# Altium PCB PCB3.PcbDoc (part 1 of 2)
Units mil, origin at the board's own origin, x right, y up, seen from the top; angles counter-clockwise.
Board outline 2978 x 3898 mil, 2 copper layers (Top Layer, Bottom Layer); 131 components, 87 nets, 395 pads, 3442 vias.
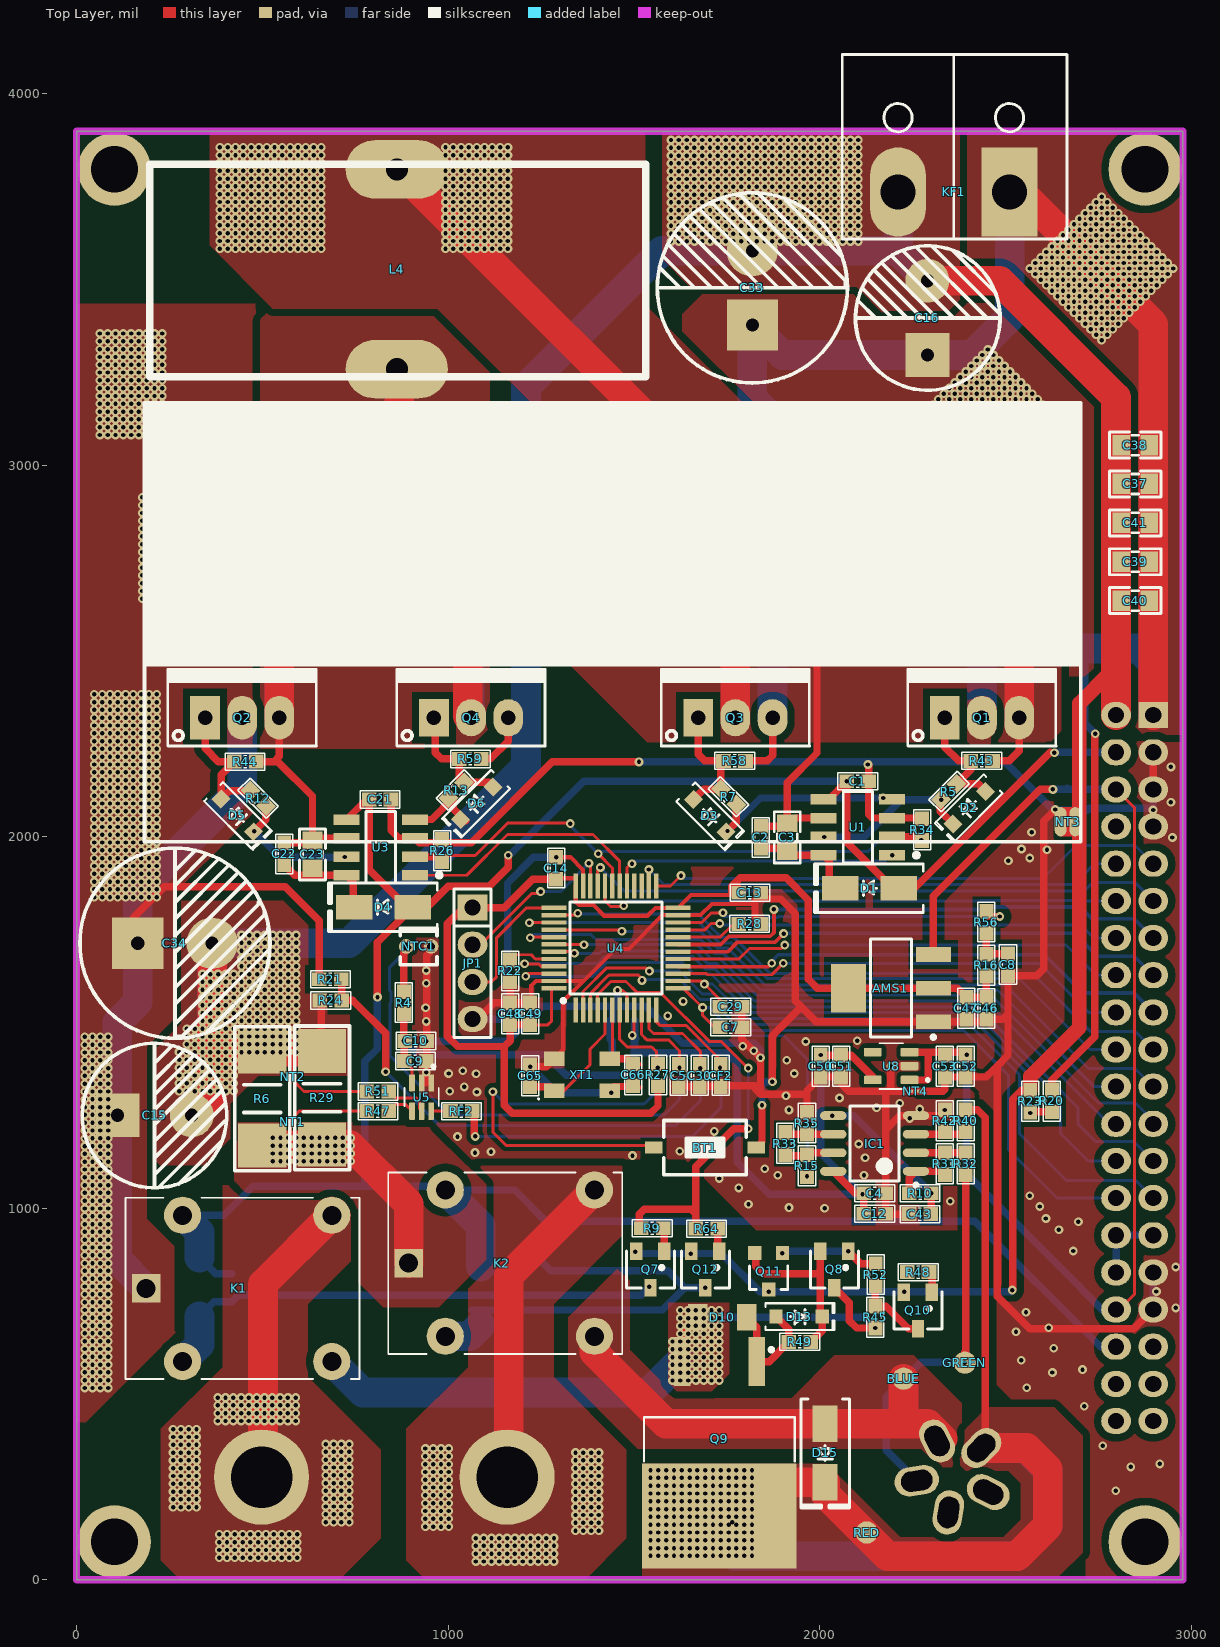
[diagram p0: Top Layer view]
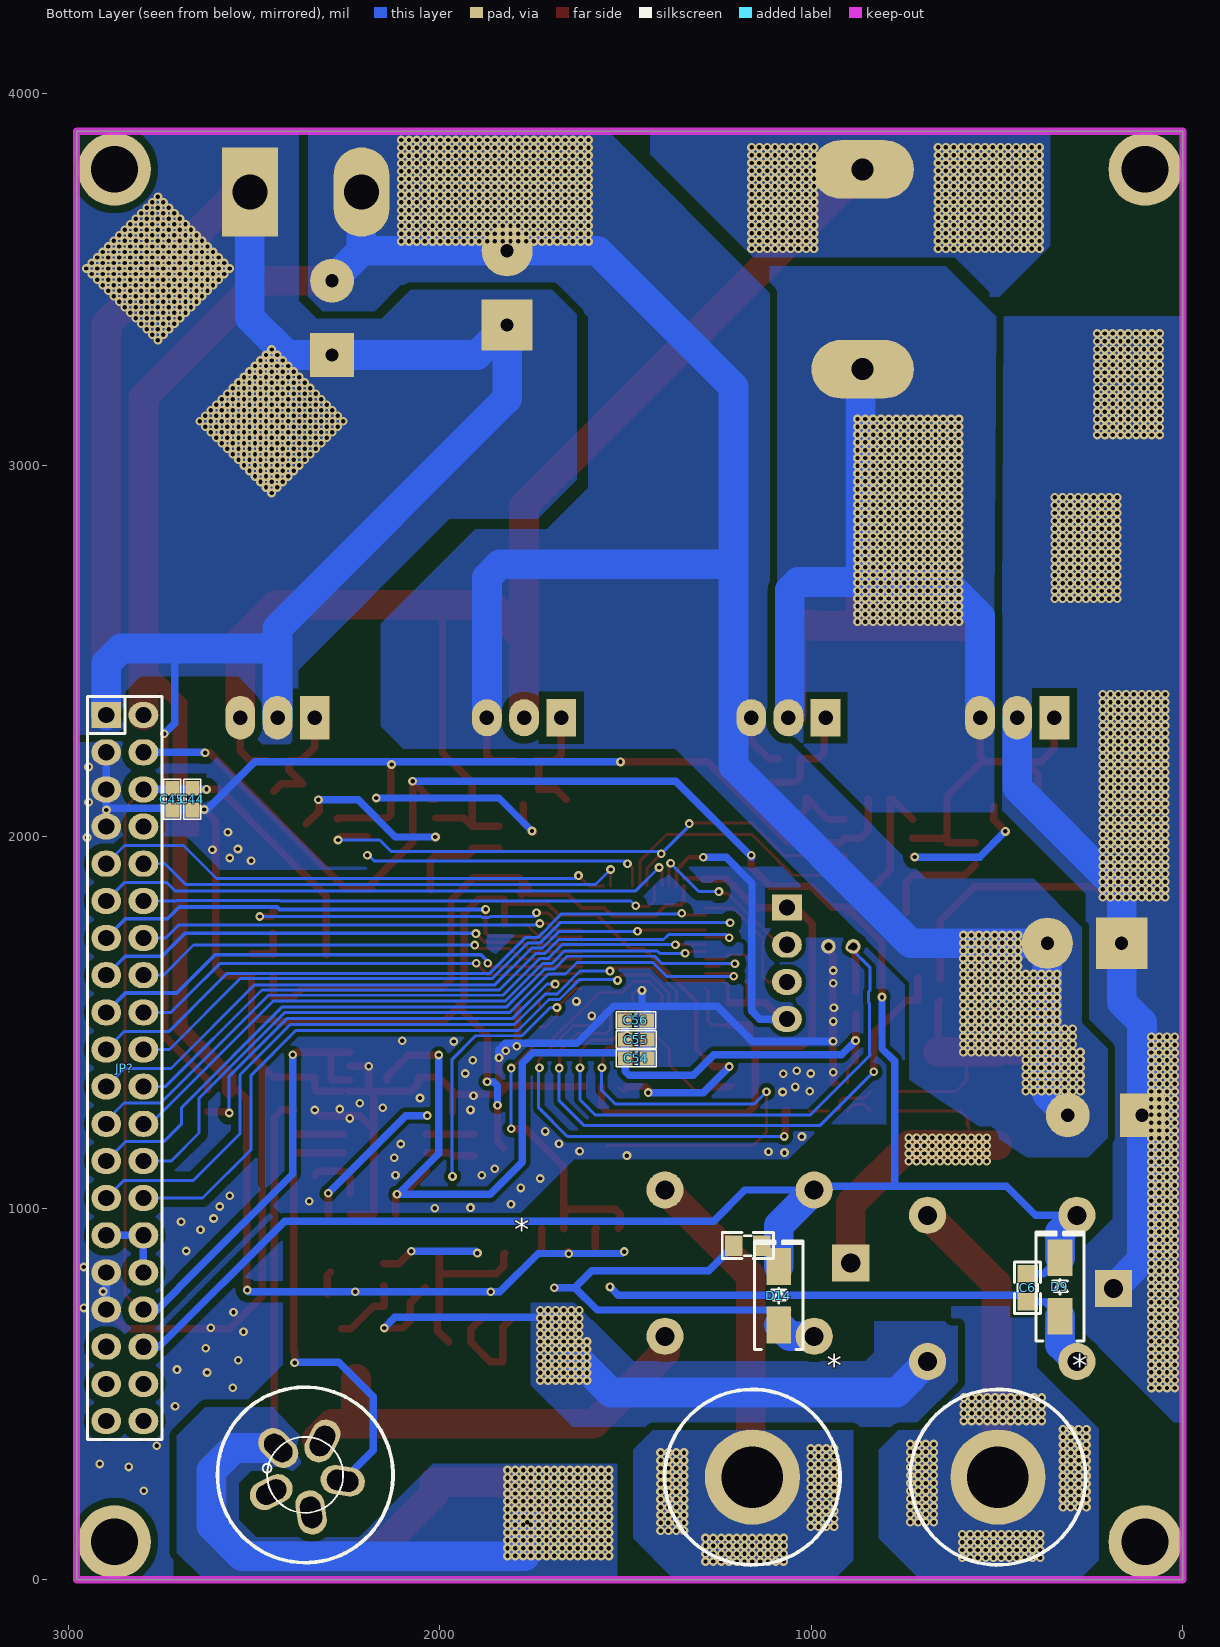
[diagram p1: Bottom Layer view, seen from below]
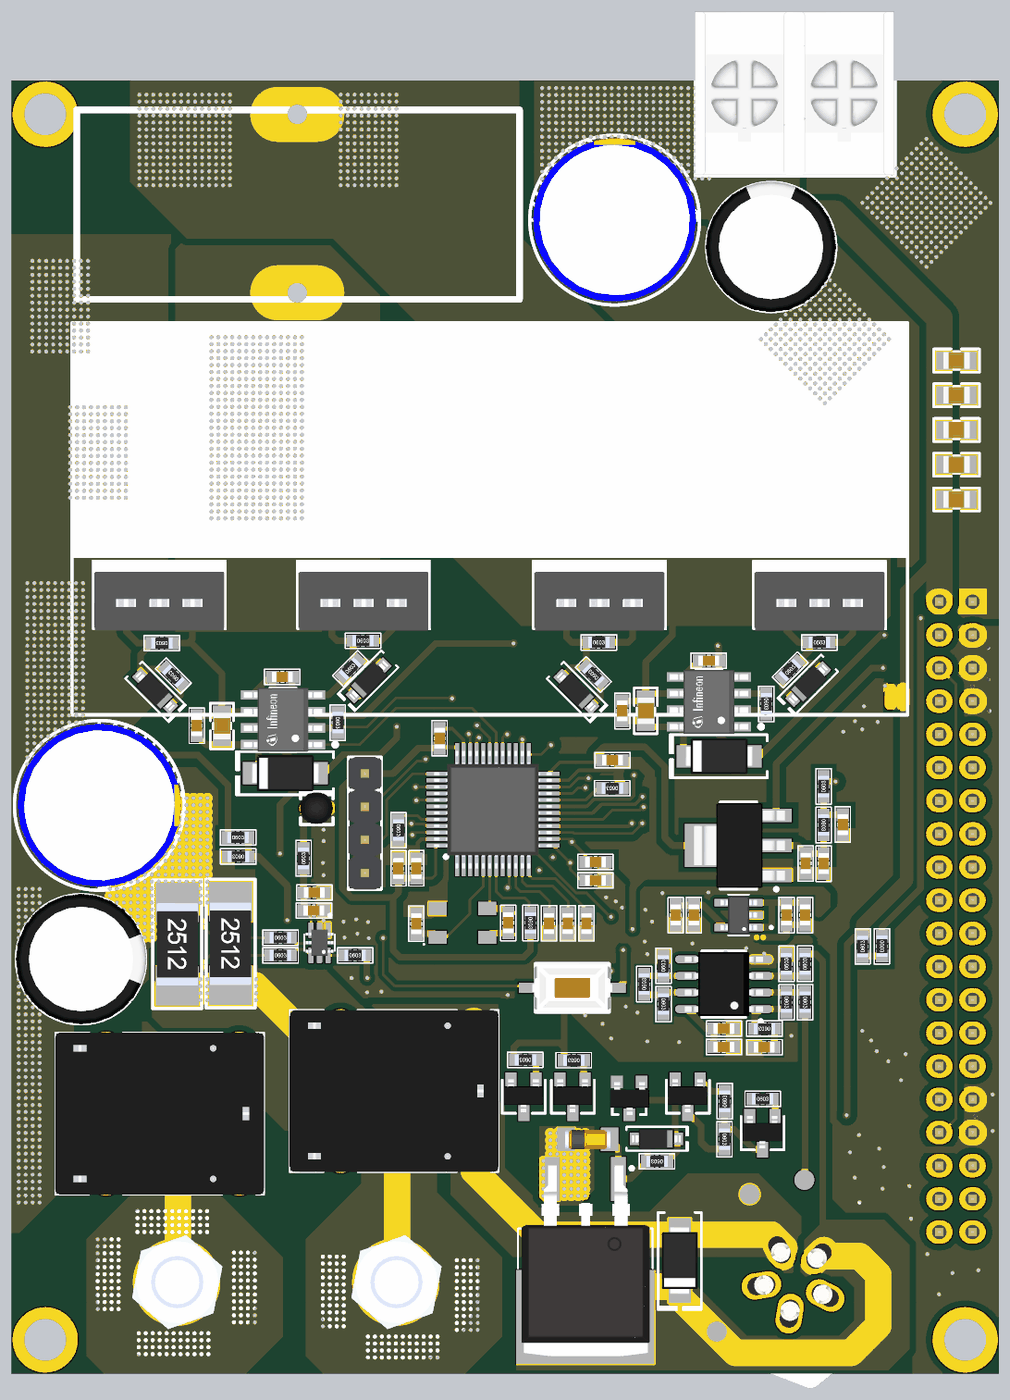
[diagram p3: 3D render of the assembled board from above, using the file's embedded part models]
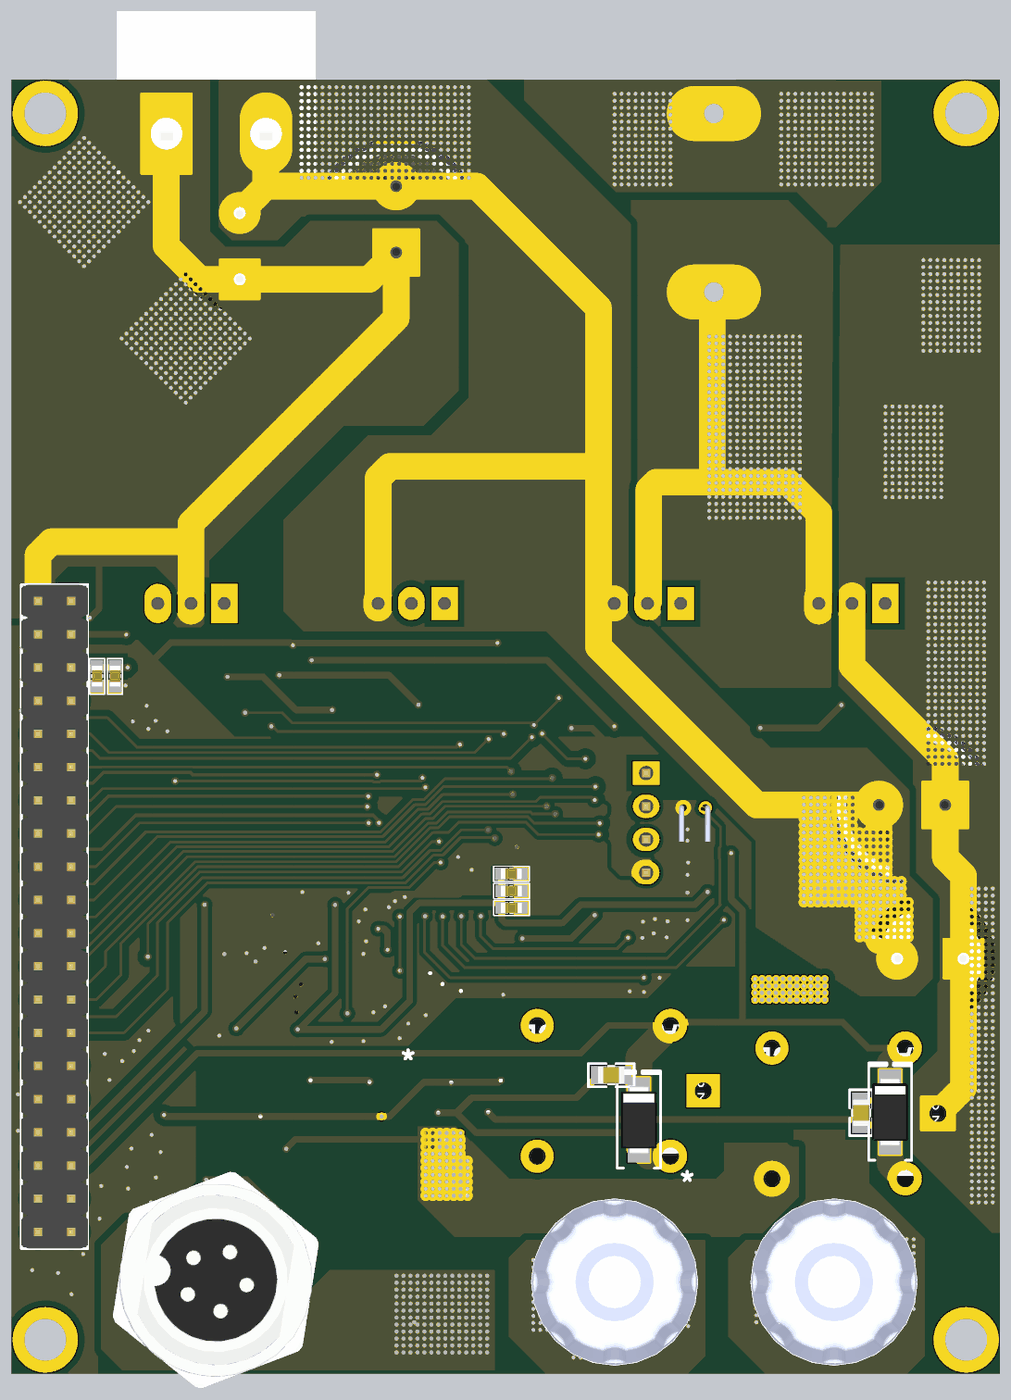
[diagram p4: 3D render of the assembled board from below, using the file's embedded part models]

## Layer stack, top to bottom
Top Solder: solder mask 0.4, Solder Resist, Dk 3.5
Top Layer: signal copper 1.4
Dielectric 1: dielectric 12.6, FR-4, Dk 4.8
Bottom Layer: signal copper 1.4
Bottom Solder: solder mask 0.4, Solder Resist, Dk 3.5

## Board outline
0,0 0,3898 2978,3898 2978,0

## Design rules (kind name [scope] priority, off if disabled: settings)
Clearance [All] p1: gap=20 ignorepadtopadclearanceinfootprint=FALSE
DiffPairsRouting [All] p1: maxlimit=10 minlimit=8 mostfreqgap=10 toplayer_minwidth=8 toplayer_maxwidth=13 toplayer_prefwidth=10 bottomlayer_minwidth=8 bottomlayer_maxwidth=13 bottomlayer_prefwidth=10 maxuncoupledlength=500
PolygonConnect [All] p1: connectstyle=Direct reliefconductorwidth=10 reliefentries=4 polygonreliefangle="90 Angle" airgapwidth=10
RoutingVias [All] p1: holewidth=11.81 width=23.62 viastyle="Through Hole" minholewidth=11.81 minwidth=23.62 maxholewidth=11.81 maxwidth=23.62
SolderMaskExpansion [All] p1: expansion=4 istentingtop=FALSE
Width [All] p1: maxlimit=80 minlimit=8 preferedwidth=20
29 further rules are at their usual default settings.

## Classes and differential pairs
differential pair S: +S_P -S_N
differential pair SO: +SO_P -SO_N

## Components (designator, comment, footprint, x,y, rotation, side; value= is the part's Value field where it differs from the comment)
* "Component_1" GX_12Jack? 2362.48,282 r45 bottom
* "Jack2" jack_coc_loa 498.06,276 r180 bottom
* "Jack1" jack_coc_loa 1159.06,276 r180 bottom
AMS1 "AMS1117-3.3V" SOT223 2192,1592 r90 top value="AMS1117-3.3V SOT223"
BLUE "TestPoin" TP-60 2225.98,540.89 r90 top
BT1 "Nut Nhan 2 Chan SMD 3x6x2.5" "Nut Nhan 2 Chan SMD 3x6x2.5" 1691.2,1163 r0 top
C1 "104" "tu 0603" 2103,2149 r180 top
C2 "105" "tu 0603" 1842,1998 r270 top
C3 "106" "tu 0805" 1913,1998 r90 top
C4 "103" "tu 0603" 2148,1040 r0 top
C5 "102" "tu 0603" 1621,1357 r90 top
C6 "10pF" "tu 0805" 418,786 r270 bottom
C7 "102" "tu 0603" 1761.47,1487 r180 top
C8 "102" "tu 0603" 2507,1655 r90 top
C9 "103" "tu 0603" 912,1396 r0 top
C10 "104" "tu 0603" 913,1450 r0 top
C12 "104" "tu 0603" 2148,985 r0 top
C13 "104" "tu 0603" 1812,1849 r0 top
C14 "104" "tu 0603" 1291,1915 r90 top
C15 "1000uF" "tu hoa 10mm" 210,1250 r0 top
C16 "1000uF" "tu hoa 10mm" 2290.27,3396 r90 top
C21 "104" "tu 0603" 817,2100 r180 top
C22 "105" "tu 0603" 559,1953.47 r270 top
C23 "106" "tu 0805" 635,1952 r90 top
C29 "102" "tu 0603" 1761.47,1542 r180 top
C30 "102" "tu 0603" 1677.5,1357 r90 top
C33 "1000uF" "tu hoa 13mm" 1819,3477 r90 top
C34 "1000uF" "tu hoa 13mm" 265,1713 r0 top
C37 "106" "tu 0805" 2849.81,2948.94 r180 top
C38 "106" "tu 0805" 2849.81,3053.55 r180 top
C39 "106" "tu 0805" 2849.81,2739.73 r180 top
C40 "106" "tu 0805" 2849.81,2635.13 r180 top
C41 "106" "tu 0805" 2849.81,2844.34 r180 top
C43 "102" "tu 0603" 2270,984 r0 top
C44 "104" "tu 0603" 2666,2101 r270 bottom
C45 "104" "tu 0603" 2720,2101 r270 bottom
C46 "104" "tu 0603" 2449,1537.79 r270 top
C47 "104" "tu 0603" 2395.07,1538.35 r270 top
C48 "104" "tu 0603" 1167,1523 r90 top
C49 "104" "tu 0603" 1221,1523 r90 top
C50 "106" "tu 0603" 2003,1382.53 r270 top
C51 "104" "tu 0603" 2058,1382.53 r270 top
C52 "106" "tu 0603" 2393,1382.53 r270 top
C53 "106" "tu 0603" 2337,1382.53 r270 top
C54 "104" "tu 0603" 1471.76,1403 r180 bottom
C55 "106" "tu 0603" 1471.76,1453.91 r180 bottom
C56 "106" "tu 0603" 1472.46,1505.53 r180 bottom
C65 "10pF" "tu 0603" 1221,1356 r90 top
C66 "10pF" "tu 0603" 1498,1359 r270 top
CF2 "102" "tu 0603" 1734,1357 r90 top
D1 "SS34" "DIODE SMA" 2134,1861 r180 top
D2 "S4" "DIODE SOD-123" 2403,2078 r225 top
D3 "S4" "DIODE SOD-123" 1704,2056 r315 top
D4 "SS34" "DIODE SMA" 826,1810 r180 top
D5 "S4" "DIODE SOD-123" 433,2057 r315 top
D6 "S4" "DIODE SOD-123" 1077,2090 r225 top
D9 "SS34" "DIODE SMA" 331,788 r90 bottom
D10 "9.1V" "DIODE ZENNER SMD SOD80" 1738.06,706 r0 top
D13 "S4" "DIODE SOD-123" 1945.01,708 r0 top
D14 "SS34" "DIODE SMA" 1088,764.26 r90 bottom
D15 "SS34" "DIODE SMA" 2015,341 r270 top
GREEN "TestPoin" TP-60 2391,584 r90 top
IC1 "LM358 SOP8" "SOP 8" 2148,1174 r180 top
JP1 "debug" "JP 1x4 DT" 1066,1809 r270 top
JP? "JP 2x20 2.54" "JP 2x20 DT" 2848,1377 r270 bottom
K1 "SRA-05VDC-CL" RELAY_SRA-05VDC-CL 447,784 r0 top
K2 "SRA-05VDC-CL" RELAY_SRA-05VDC-CL 1154,852 r0 top
KF1 "CON 2 KF7.62" "CON 2 KF7.62" 2509,3735 r180 top
L4 "97uH" IND_ATCA-08-750M-V 862,3583 r270 top
NT1 "0.25mm" NetTie_0.25mm 580,1222.32 r90 top net-tie
NT2 "0.25mm" NetTie_0.25mm 582,1364 r270 top net-tie
NT3 "NetTie_2mm" NetTie_2mm 2688,2040 r180 top net-tie
NT4 "0.25mm" NetTie_0.25mm 2266.71,1315 r180 top net-tie
NTC1 "50k" MF52 920.06,1703 r180 top
Q1 "IRFZ44" TO220#1 2337,2320 r0 top
Q2 "IRFZ44" TO220#1 346,2320 r0 top
Q3 "IRFZ44" TO220#2 1673.33,2320 r0 top
Q4 "IRFZ44" TO220#2 962,2320 r0 top
Q7 "BC817" SOT-23 1545,835 r180 top value=C9014
Q8 "BC817" SOT-23 2040,835 r180 top value=C9014
Q9 "IRF4905S" D2PACK 1709,346 r270 top
Q10 "BC817" SOT-23 2265,725 r180 top value=C9014
Q11 "BA" SOT23 1863,830.08 r180 top
Q12 "BC817" SOT-23 1693,835 r180 top value=C9014
R4 "10k" "tro smd 0603" 881,1553 r90 top
R5 "10R" "Tro smd 0603" 2348,2121 r45 top
R6 "0.01R" "tro smd 2512" 500,1295 r270 top
R7 "10R" "Tro smd 0603" 1755,2107 r135 top
R9 "10k" "Tro smd 0603" 1550,946 r180 top
R10 "1k" "Tro smd 0603" 2271,1040 r180 top
R12 "10R" "Tro smd 0603" 488.88,2103.12 r135 top
R13 "10R" "Tro smd 0603" 1022,2125 r45 top
R15 "1k" "Tro smd 0603" 1966,1114.47 r270 top
R16 "4.7k" "Tro smd 0603" 2449,1654.2 r270 top
R20 "10k" "tro smd 0603" 2625,1288.53 r270 top
R21 "10k" "tro smd 0603" 683,1616 r0 top
R22 "10k" "Tro smd 0603" 1167,1638.47 r270 top
R23 "100k" "tro smd 0603" 2567,1287.53 r90 top
R24 "100k" "tro smd 0603" 684.47,1559 r180 top
R26 "10k" "Tro smd 0603" 984,1962.53 r270 top
R27 "10k" "Tro smd 0603" 1565,1359 r270 top
R28 "10k" "Tro smd 0603" 1812,1765 r180 top
R29 "0.01R" "tro smd 2512" 661,1297 r270 top
R31 "100k" "Tro smd 0603" 2337,1120 r270 top
R32 "4.7k" "Tro smd 0603" 2393,1120 r270 top
R33 "100k" "Tro smd 0603" 1908,1174 r90 top
R34 "10k" "Tro smd 0603" 2276,2019 r270 top
R35 "10k" "Tro smd 0603" 1966,1229 r90 top
R40 "4.7k" "Tro smd 0603" 2393,1235 r90 top
R42 "100k" "Tro smd 0603" 2337,1235 r90 top
R43 "10k" "tro smd 0603" 2436,2204 r0 top
R44 "10k" "tro smd 0603" 454,2202 r180 top
R45 "4.7k" "tro smd 0603" 2150,707 r270 top
R47 "22R" "tro smd 0603" 811,1261 r0 top
R48 "1k" "tro smd 0603" 2265,828 r0 top
R49 "22R" "tro smd 0603" 1947,640 r180 top
R51 "22R" "tro smd 0603" 811,1314 r0 top
R52 "1k" "tro smd 0603" 2151,821 r90 top
R56 "4.7k" "Tro smd 0603" 2449,1769.6 r90 top
R58 "10k" "tro smd 0603" 1771,2204 r0 top
R59 "10k" "tro smd 0603" 1059.74,2209 r0 top
R64 "10k" "Tro smd 0603" 1696,945 r180 top
RED "TestPoin" TP-60 2126.98,126.89 r90 top
RF2 "1K" "Tro smd 0603" 1036,1261 r0 top
U1 "IR2184S" SOIC127P600X175-8N-12-V 2103,2025 r180 top
U3 "IR2184S" SOIC127P600X175-8N-12-V 818.87,1971 r180 top
U4 "STM32F103C8T6" LQFP-48_19.6_393_58X11_SMD 1452,1700 r90 top
U5 "INA199A3DCKR" SOT65P210X110-6N 929,1299 r270 top
U8 "LP5907MFX-2.85/NOPB" SOT95P280X145-5N 2192.59,1382.4 r180 top
XT1 "8 MHz" DFN220P320X110-4N 1360,1359 r0 top
? "10pF" "tu 0805" 1171,899 r0 bottom

## Footprints (in the part's own frame and the unit in brackets; to place one, negate y for a bottom-side part, rotate by r counter-clockwise, add the part's x,y. Pads: shape width x height; smd on the part's side, far side on the other; paste and mask are expansions set on the pad)
"CON 2 KF7.62" [mil]
  rect 150x240 hole 95: 1(-2,0)
  oval 150x240 hole 95: 2(298,0)
  silkscreen extent -157,-370 448,126, body extent -152,-370 448,122, height 493
D2PACK [mil]
  rect 132.23x44.65 smd: 1(-241.08,121.35) 3(-241.08,-78.65)
  rect 282.7x416 smd: 2(175.12,21.35)
  silkscreen extent -278,-182 28,224, body extent -282,-171 293,216, height 166
DFN220P320X110-4N [mm]
  rect 1.4x1 smd: 1(-1.9,-1.1) 3(1.9,1.1) G(-1.9,1.1) G(1.9,-1.1)
  silkscreen extent -3,-1.7 -2.9,-1.6, body extent -2.55,-1.65 2.55,1.65, height 1.1
"DIODE SMA" [mm] "SMA"
  rect 2.5x1.7 smd: 1(-2,0) 2(2,0)
  silkscreen extent -3.68,-1.65 3.75,1.65, body extent -2.6,-1.37 2.6,1.37, height 2.4
"DIODE SOD-123" [mm] "SOD-123"
  rect 0.9x0.95 smd: 1(-1.575,0) 2(1.575,0)
  silkscreen extent -2.3,-0.92 2.41,0.92, body extent -1.86,-0.78 1.86,0.77, height 1.35
"DIODE ZENNER SMD SOD80" [mm] "SOD80"
  rect 1.35x1.8 smd: 1(1.675,0) 2(-1.675,0)
  body extent -1.75,-0.76 1.75,0.74, height 1.45
GX_12Jack? [mm]
  oval 3.048x2 hole 1.4 slot 2.159 at 0 deg: 1(2.606,0)
  oval 3.048x2 hole 1.4 slot 2.159 at 108 deg rot 108: 2(0.809,-2.473)
  oval 3.048x2 hole 1.4 slot 2.159 at 36 deg rot 36: 3(-2.098,-1.528)
  oval 3.048x2 hole 1.4 slot 2.159 at 144 deg rot 144: 4(-2.098,1.528)
  oval 3.048x2 hole 1.4 slot 2.159 at 72 deg rot 72: 5(0.809,2.473)
  silkscreen extent -6,-6 6,6, body extent -10.89,-11.1 10.89,11.1, height 16.11
IND_ATCA-08-750M-V [mm]
  oval 4x7 hole 1.5: 1(-5.4,0) 2(8.255,0)
  silkscreen extent -5.75,-16.89 8.76,17.02
jack_coc_loa [mm]
  round 6.5 hole 4.2: 1(0,0)
  silkscreen extent -6,-6 6,6, body extent -6.45,-6.4 6.35,6.4, height 28.2
"JP 1x4 DT" [mil] "4 pins, 1 row, straight, gold plating"
  rect 70x80 hole 43.31: 1(0,0)
  oval 70x80 hole 43.31: 2(100,0) 3(200,0) 4(300,0)
  silkscreen extent -50,-50 350,50, body extent -50,-50 350,50, height 336
"JP 2x20 DT" [mil] "40 pins, dual pin, straight, gold plating"
  rect 70x80 hole 43.31: 1(-950,-50)
  oval 70x80 hole 43.31: 2(-850,-50) 3(-750,-50) 4(-650,-50) 5(-550,-50) 6(-450,-50) 7(-350,-50) 8(-250,-50) 9(-150,-50) 10(-50,-50) 11(50,-50) 12(150,-50) 13(250,-50) 14(350,-50) 15(450,-50) 16(550,-50) 17(650,-50) 18(750,-50) 19(850,-50) 20(950,-50) 21(950,50) 22(850,50) 23(750,50) 24(650,50) 25(550,50) 26(450,50) 27(350,50) 28(250,50) 29(150,50) 30(50,50) 31(-50,50) 32(-150,50) 33(-250,50) 34(-350,50) 35(-450,50) 36(-550,50) 37(-650,50) 38(-750,50) 39(-850,50) 40(-950,50)
  silkscreen extent -1000,-100 1000,100, body extent -1000,-100 1000,100, height 337
LQFP-48_19.6_393_58X11_SMD [mm] "48LQFP"
  rect 1.7x0.3 smd mask+0.076: 1(-4.238,2.75) 2(-4.238,2.25) 3(-4.238,1.75) 4(-4.238,1.25) 5(-4.238,0.75) 6(-4.238,0.25) 7(-4.238,-0.25) 8(-4.238,-0.75) 9(-4.238,-1.25) 10(-4.238,-1.75) 11(-4.238,-2.25) 12(-4.238,-2.75) 25(4.238,-2.75) 26(4.238,-2.25) 27(4.238,-1.75) 28(4.238,-1.25) 29(4.238,-0.75) 30(4.238,-0.25) 31(4.238,0.25) 32(4.238,0.75) 33(4.238,1.25) 34(4.238,1.75) 35(4.238,2.25) 36(4.238,2.75)
  rect 0.3x1.7 smd mask+0.076: 13(-2.75,-4.238) 14(-2.25,-4.238) 15(-1.75,-4.238) 16(-1.25,-4.238) 17(-0.75,-4.238) 18(-0.25,-4.238) 19(0.25,-4.238) 20(0.75,-4.238) 21(1.25,-4.238) 22(1.75,-4.238) 23(2.25,-4.238) 24(2.75,-4.238) 37(2.75,4.238) 38(2.25,4.238) 39(1.75,4.238) 40(1.25,4.238) 41(0.75,4.238) 42(0.25,4.238) 43(-0.25,4.238) 44(-0.75,4.238) 45(-1.25,4.238) 46(-1.75,4.238) 47(-2.25,4.238) 48(-2.75,4.238)
  silkscreen extent -3.72,-3.15 3.15,3.72, body extent -4.5,-4.5 4.5,4.5, height 1.7
MF52 [mm]
  round 1 hole 0.55: 1(-0.869,-0.039) 2(0.831,-0.039)
  silkscreen extent -1.27,-1.29 1.23,1.21, body extent -1.24,-1.24 1.26,2.56, height 5.45
NetTie_0.25mm [mm]
  round 0.25 smd paste-2 mask+0.102: 1(0,0) 2(0.5,0)
  Top Layer region: 0,0.125 0.5,0.125 0.5,-0.125 0,-0.125
NetTie_2mm [mm]
  oval 0.8x2 smd paste-2 mask+0.102: 1(0,0) 2(1,0)
  Top Layer region: 0,1 1,1 1,-1 0,-1
"Nut Nhan 2 Chan SMD 3x6x2.5" [mm] "Switch SMD type"
  rect 1.2x0.8 smd: 1(-3.5,0) 2(3.5,0)
  silkscreen extent -2.82,-1.85 2.82,1.85, body extent -3.05,-1.85 3.05,1.85, height 2.5
RELAY_SRA-05VDC-CL [mm]
  round 2.54 hole 1.3: COIL1(-4.1,5) COIL2(-4.1,-5) NC(6.1,5) NO(6.1,-5)
  rect 1.95x1.95 / inner round 1.95 / far side rect 2.54x2.54 hole 1.3: COM(-6.6,0)
  silkscreen extent -8,-6.2 8,6.2, body extent -8,-6.2 8,6.2, height 17.2
SOIC127P600X175-8N-12-V [mm] "SOIC,1.27mm pitch;8 pin,3.90mm W X 4.90mm L X 1.75mm H body"
  rect 1.78x0.72 smd paste+0 mask+0: 1(-2.34,1.905) 2(-2.34,0.635) 3(-2.34,-0.635) 4(-2.34,-1.905) 5(2.34,-1.905) 6(2.34,-0.635) 7(2.34,0.635) 8(2.34,1.905)
  silkscreen extent -4.15,-2.45 1,2.45, body extent -3,-2.45 3,2.45, height 1.76
"SOP 8" [mm] "SOIC, 8-Leads, Body 4.9x3.9mm, Pitch 1.27mm, IPC High Density"
  oval 1.8x0.6 smd: 1(-2.825,1.905) 2(-2.825,0.635) 3(-2.825,-0.635) 4(-2.825,-1.905) 5(2.825,-1.905) 6(2.825,-0.635) 7(2.825,0.635) 8(2.825,1.905)
  silkscreen extent -2.95,-2.55 1.67,2.98, body extent -2.99,-2.45 3,2.45, height 1.6
SOT23 [mm] "SOT23"
  rect 0.9x0.95 smd: 1(-0.95,-1.25) 2(0,1.25)
  rect 0.9x0.95 smd mask+0: 3(0.95,-1.25)
  silkscreen extent -1.3,-0.38 1.3,1.25, body extent -1.52,-1.23 1.48,1.27, height 1.06
SOT65P210X110-6N [mm]
  rrect25% 1.19x0.4 smd: 1(-0.96,0.65) 2(-0.96,0) 3(-0.96,-0.65) 4(0.96,-0.65) 5(0.96,0) 6(0.96,0.65)
  silkscreen extent -2.2,-1.17 0.62,1.17, body extent -1.05,-1 1.05,1, height 1.1
SOT95P280X145-5N [mm]
  rrect25% 1.21x0.58 smd paste+0 mask+0.102: 1(-1.255,0.95) 2(-1.255,0) 3(-1.255,-0.95) 4(1.255,-0.95) 5(1.255,0.95)
  silkscreen extent -2.6,-1.56 0.8,1.56, body extent -1.4,-1.45 1.4,1.45, height 1.45
SOT223 [mm]
  rect 1x2.4 smd: 1(-2.3,-2.9) 2(0,-2.9) 3(2.3,-2.9)
  rect 3.3x2.4 smd: 4(0,2.9)
  silkscreen extent -3.47,-3.03 3.35,1.4, body extent -3.25,-3.56 3.25,3.4, height 1.68
SOT-23 [mm] "SOT 23 _ 1-3-2"
  rect 0.85x1.2 smd: 1(-0.94,-1.245) 2(0.985,-1.25) 3(0.005,1.25)
  silkscreen extent -1.65,-1.27 1.65,1.27, body extent -1.47,-1.33 1.53,1.17, height 1.06
TO220#1 [mil] "TO-220"
  rect 80x118.11 hole 39: 1(0,0)
  oval 80x118.11 hole 39: 2(100,0) 3(200,0)
  silkscreen extent -100,-76 300,130, body extent -95,-80 295,97, height 323
TO220#2 [mil] "TO-220"
  rect 80x100 hole 39: 1(0,0)
  oval 80x100 hole 39: 2(100,0) 3(200,0)
  silkscreen extent -100,-76 300,130, body extent -95,-80 295,97, height 323
TP-60 [mil]
  round 60 smd: 1(0.11,-0.02)
"tro smd 0603" [mm] "Chip Capacitor, 2-Leads, Body 1,60x0,80mm, IPC Medium Density"
  rect 1x0.95 smd mask+0.076: 1(-0.75,0) 2(0.75,0)
  silkscreen extent -1.35,-0.58 1.37,0.58, body extent -0.82,-0.42 0.82,0.43, height 0.44
"Tro smd 0603" [mm] "Chip Capacitor, 2-Leads, Body 1,60x0,80mm, IPC Medium Density"
  rect 1x0.95 smd mask+0.076: 1(-0.75,0) 2(0.75,0)
  silkscreen extent -1.35,-0.58 1.37,0.58, body extent -0.82,-0.42 0.82,0.43, height 0.44
"tro smd 2512" [mm]
  rect 3x3.3 smd: 1(-3.2,0) 2(3.2,0)
  silkscreen extent -4.9,-1.88 4.93,1.88, body extent -3.12,-1.57 3.18,1.58, height 0.82
"tu 0603" [mm] "Chip Capacitor, 2-Leads, Body 1,60x0,80mm, IPC Medium Density"
  rect 1x0.95 smd mask+0.076: 1(-0.75,0) 2(0.75,0)
  silkscreen extent -1.35,-0.58 1.37,0.58, body extent -0.8,-0.4 0.8,0.4, height 0.9
"tu 0805" [mm] "Compoment SMD 80x50mil"
  rect 1.2x1.4 smd: 1(-0.946,-0.003) 2(0.954,-0.003)
  silkscreen extent -1.75,-0.89 1.75,0.89, body extent -1.01,-0.64 1.01,0.63, height 0.61
"tu hoa 10mm" [mm]
  rect 3x3 hole 0.9: 1(-2.54,0)
  round 3 hole 0.9: 2(2.54,0)
  silkscreen extent -4.95,-4.96 4.93,4.92, body extent -5,-5 5.01,5, height 20.01
"tu hoa 13mm" [mm]
  rect 3.5x3.5 hole 0.9: 1(-2.54,0)
  round 3.5 hole 0.9: 2(2.54,0)
  silkscreen extent -6.5,-6.5 6.5,6.5, body extent -6.25,-6.25 6.26,6.25, height 23.02

## Part data
* *: library part Jack?
AMS1: library part "AMS1117 SMD", "Dán", Chung_Loai=Dán, Don_Vi=Con, Ma_Hang=MH000596
C1 C2 C13 C14 C21 C22 C44 C45 C46 C47 C48 C49: library part "Tu 0603 101 50V 10%", "Dán", Chung_Loai=Dán, Don_Vi=Con, Ma_Hang=MH004565, So_Chan=2, Ten_Linh_Kien="Tụ 0603 101-0.1nF 10% 50V"
C3 C6 C23 ?: library part "Tu 0805 101 50V 20%", "Dán", Chung_Loai=Dán, Don_Vi=Con, Ma_Hang=MH002806, So_Chan=2, Ten_Linh_Kien="Tụ 0805 101-0.1nF 50V 20%"
C4 C7 C8 C9 C10 C12 C43 C50 C51 C52 C53 C54 C55 C56 CF2: library part "Tu 0603 106 16V 20%", "Dán", Chung_Loai=Dán, Don_Vi=Con, Ma_Hang=MH004848, So_Chan=2, Ten_Linh_Kien="Tụ 0603-10uF 20% 16V"
C5 C29 C30 C65 C66: library part "Tu 0603 104 50V 10%", "Dán", Chung_Loai=Dán, Don_Vi=Con, Ma_Hang=MH004568, So_Chan=2, Ten_Linh_Kien="Tụ 0603 104-100nF 10% 50V"
C15 C16: library part "Tu Hoa 1000uF 10V 10x12", "Cắm", Chung_Loai=Cắm, Don_Vi=Con, Ma_Hang=MH006614, So_Chan=2, Ten_Linh_Kien="Tụ Hóa 1000uF 10V 10x12MM"
C33 C34: library part "Tu Hoa 1000uF 50V 13x26", "Cắm", Chung_Loai=Cắm, Don_Vi=Con, Ma_Hang=MH006619, So_Chan=2, Ten_Linh_Kien="Tụ Hóa 1000uF 50V"
C37 C38 C39 C40 C41: library part "Tu 0805 106 16V 10%", "Dán", Chung_Loai=Dán, Don_Vi=Con, Ma_Hang=MH004553, So_Chan=2, Ten_Linh_Kien="Tụ 0805 106-10uF 10% 16V"
D1 D4 D9 D14 D15: library part "Diode SS34 ( 1N5822 )", "Dán", Chung_Loai=Dán, Don_Vi=Con, Ma_Hang=MH002104, Ten_Linh_Kien="Diode SS34 3A 40V SMA ( 1N5822 SS34A)"
D2 D3 D5 D6 D13: library part "Diode S4", "Dán", Chung_Loai=Dán, Don_Vi=Con, Ma_Hang=MH005519, Ten_Linh_Kien="Diode S4 SOD123 ( 1N5819 SOD123)"
D10: library part "Diode Zener 9.1V", "Dán", Chung_Loai=Dán, Don_Vi=Con, Ma_Hang=MH002882, Ten_Linh_Kien="Diode Zener 1/2W 9.1V SMD1206 ZMM9.1"
IC1: "Dán", Chung_Loai=Dán, Don_Vi=Con, Ma_Hang=MH000609, Ten_Linh_Kien="LM358 SOP8"
JP1: library part "JP 1x4 2.54 Duc Thang", "Cắm", Chung_Loai=Cắm, Don_Vi=Con, Ma_Hang=MH000903, Ten_Linh_Kien="Jump Đơn Đực 2.54MM 1x40P Thẳng 11MM"
JP?: library part "JP 2x20 2.54 Duc Thang", "Cắm", Chung_Loai=Cắm, Don_Vi=Con, Ma_Hang=MH002686, Ten_Linh_Kien="Jump Đôi Đực 2.54MM 2x40P Thẳng 11MM"
K1 K2: Package=Package, Check_prices=https://www.snapeda.com/parts/SRA-05VDC-CL/Songle+Relay/view-part/?ref=eda, MF="Songle Relay", MP=SRA-05VDC-CL, SnapEDA_Link=https://www.snapeda.com/parts/SRA-05VDC-CL/Songle+Relay/view-part/?ref=snap
KF1: "Cắm", Chung_Loai=Cắm, Don_Vi=Con, Ma_Hang=MH002053, Ten_Linh_Kien="CON 2 KF7.62-2P 7.62MM (Đen Thẳng)"
L4: library part ATCA-08-750M-V, Package=None, Availability=Unavailable, MP=ATCA-08-750M-V, Price=None
NT1 NT2 NT4: library part NetTie_0.25mm
NTC1: library part NCP15XH103F03RC, "THERMISTOR 10K OHM NTC 0402 SMD"
Q1 Q2 Q3 Q4: library part "FET IRFZ44 DIP", "TO-220"
Q7 Q8 Q10 Q12: library part "Trans BC817", "SOT-23 - C8658"
Q9: "55V 75A"
Q11: library part "Trans A1015 BA SMD", "PNP 600mW, ECB"
R4 R20 R21 R23 R24: library part "Tro 0603 5% 10k", "Dán", Chung_Loai=Dán, Don_Vi=Con, Ma_Hang=MH006316, So_Chan=2, Ten_Linh_Kien="Trở 0603 5% 10k"
R5 R7 R9 R10 R12 R13 R15 R16 R22 R26 R27 R28 R31 R32 R33 R34 R35 R40 R42 R45 R47 R48 R49 R51 R52 R56 R64 RF2: library part "Tro 0603 5% 10R", "Dán", Chung_Loai=Dán, Don_Vi=Con, Ma_Hang=MH006317, So_Chan=2, Ten_Linh_Kien="Trở 0603 5% 10R"
R6 R29: library part "Tro 2512 1% 0.01R", "Dán", Chung_Loai=Dán, Don_Vi=Con, Ma_Hang=MH004912, So_Chan=2, Ten_Linh_Kien="Trở 2512 1% R010-0.01R 1W"
R43 R44 R58 R59: library part "Tro 0603 1% 0R", "Dán", Chung_Loai=Dán, Don_Vi=Con, Ma_Hang=MH005792, So_Chan=2, Ten_Linh_Kien="Trở 0603 1% 0R"
U1 U3: "Half-Bridge Driver", Manufacturer="Infineon Technologies", Manufacturer Order Number=IR2184S, PackageReference=PG-DSO-8-910
U4: library part IC_STM32F103C8T6, "ARM® Cortex®-M3 STM32F1 Microcontroller IC 32-Bit 72MHz 64KB (64K x 8) FLASH 48-LQFP (7x7)", Alternate Part Number-1=NA, Case/Package=LQFP48, Manufacturer=STMicroelectronics, Manufacturer Part Number=STM32F103C8T6, Supplier Part Number-1=STM32F103C8T6, Supplier-1=LCSC
U5: "26V, bi-directional current sense amplifier", Package="SOT-SC70-6 Texas Instruments", Check_prices=https://www.snapeda.com/parts/INA199A3DCKR/Texas+Instruments/view-part/?ref=eda, MF="Texas Instruments", MP=INA199A3DCKR, SnapEDA_Link=https://www.snapeda.com/parts/INA199A3DCKR/Texas+Instruments/view-part/?ref=snap
U8: "250-mA, low-noise, high-PSRR, ultra-low-dropout voltage regulator with low IQ and enable", Package="SOT-23-5 Texas Instruments", Check_prices=https://www.snapeda.com/parts/LP5907MFX-2.85/NOPB/Texas+Instruments/view-part/?ref=eda, MF="Texas Instruments", MP=LP5907MFX-2.85/NOPB, SnapEDA_Link=https://www.snapeda.com/parts/LP5907MFX-2.85/NOPB/Texas+Instruments/view-part/?ref=snap
XT1: library part ABM3B-8.000MHZ-10-1-U-T, "Crystal 8MHz ±10ppm 10pF 200 Ohm -10°C ~ 60°C Surface Mount 4-SMD, No Lead (DFN, LCC)", Frequency Stability=±10ppm, Load Capacitance=10pF, Manufacturer="Abracon LLC", Operating Mode=Fundamental, Operating Temperature="-10°C ~ 60°C", Package / Case="4-SMD, No Lead", Ratings=-, Supplier Part Number 1=535-9721-1-ND, Category="Crystals, Oscillators, Resonators", ComponentLink1Description=http://www.abracon.com/Resonators/abm3b.pdf, ComponentLink1URL=http://www.abracon.com/Resonators/abm3b.pdf, Frequency Tolerance=±10ppm, Height - Seated (Max)="0.043\" (1.10mm)", Manufacturer Part Number=ABM3B-8.000MHZ-10-1-U-T, Mounting Type="Surface Mount", Packaging="Cut Tape (CT)", Part Status=Active, Pricing 1="1=0.69, 10=0.578, 50=0.5198, 100=0.462, 500=0.4389 (USD)", Pricing 2="1000=0.336, 3000=0.315, 5000=0.3045, 10000=0.294 (USD)", RoHS="RoHS Compliant", Size / Dimension="0.197\" L x 0.126\" W (5.00mm x 3.20mm)", Stock=35437, Supplier 1=Digi-Key, Supplier 2=Digi-Key, Supplier Part Number 2=535-9721-2-ND, Type="MHz Crystal"
BT1: Ma_Hang=MH001036, Ten="Nút Nhấn 2 Chân 3x6x2.5MM SMD"

## Free pads (board coordinates)
  round 196.85 hole 125.98: 12(102,102) 12(102,3796) 12(2876,102) 12(2876,3796)

## Via types
v1: diameter 23.62, hole 11.81, Top Layer to Bottom Layer, tented both sides, 2994 vias
v2: diameter 23.62, hole 11.81, Top Layer to Bottom Layer, 448 vias

## Nets (pads, with @x,y where several pads share a name; then routed paths per layer and width w, separated by ;. In a path a pad name is that pad's centre, name@x,y a point inside that pad or via, vN(x,y) a via of type N, cw(c..) or ccw(c..) an arc to the next point about the centre after c; other vN are vias at no path point)
3v3: AMS1.2 AMS1.4 C13.1 C14.1 C46.1 C47.1 C48.1 C49.1 JP1.1 R16.2 R27.2 U4.24 U4.36 U4.48 | length 3336.4
  Top Layer w8: C49.1@1221,1493.47 1268.47,1493.47 1279,1504 1279,1585.58 U4.48@1285.15,1591.73
  Top Layer w11: C14.1@1291,1885.47 1306.53,1885.47 1304,1888 U4.36@1343,1888 ; U4.36@1343.73,1866.85 1343.73,1824.27 1352.19,1815.81 1391.19,1815.81 1420,1787 1537,1787 1558.27,1808.27 U4.24@1618.85,1808.27 1653.58,1843 C13.1@1763,1843
  Top Layer w20: C49.1@1221,1493.47 C48.1@1167,1493.47 1167,1451 1151,1435 ; C14.1@1291,1885.47 1227.47,1885.47 1151,1809 JP1.1@1066,1809 1042,1809 998,1765 998,1463 1026,1435 1151,1435 ; R27.2@1565,1329.47 1565,1275 1545,1255 1173,1255 1151,1277 1151,1435 ; C13.1@1763,1853.47 1763,1866 1786,1889 1910,1889 1970,1829 1970,1616 1994,1592 AMS1.4@2077.83,1592 AMS1.2@2306.17,1592 2370.94,1592 C47.1@2395.07,1567.87 2448.45,1567.87 C46.1@2449,1567.32 R16.2@2449,1624.67 ; C13.1@1778,1843 C13.1@1778,1866 ; C13.1@1778,1853.47 C13.1@1782.47,1849
+5: AMS1.3 C44.1 C45.1 C52.1 C53.1 JP?.24 JP?.38 U8.1 U8.3 | length 3373.7
  Top Layer w8: JP?.24@2798,727 2806,727 2848,769 2848,2077 JP?.38@2798,2127
  Top Layer w20: U8.1@2242,1345 2290,1345 2293,1348 2293,1415.8 2289,1419.8 ; U8.3@2242,1419.8 2289,1419.8 ; AMS1.3@2306.17,1682.55 2306.17,1839.17 2445,1978 2594,2127 v1(2628,2127) ; v1(2396.13,1412.62) 2395.57,1412.06 C52.1@2393,1412.06 2385.25,1419.8 2289,1419.8
  Bottom Layer w20: v1(2396.13,1412.62) 2396.13,1091.87 2646,842 2761,727 JP?.24@2798,727 ; v1(2628,2127) 2662.47,2127 C44.1@2666,2130.53 2669.53,2127 JP?.38@2798,2127
+12: ?.1 C1.2 C6.1 C21.2 D1.1 D4.1 D9.2 D14.2 JP?.23 JP?.39 K1.COIL1 K2.COIL1 U1.5 U3.5 | length 7265.4
  Top Layer w20: U3.5@726.75,2046 780.75,2100 C21.2@787.47,2100 787.47,1911.27 D4.1@902.74,1796 ; v1(810,1568) 810,1715.26 D4.1@904.74,1810 944,1810 1000,1866 1111,1866 1162,1917 v1(1162,1950) ; U1.5@2010.87,2100 2024.47,2100 v1(2073.47,2149) 2073.47,1984.53 2197,1861 D1.1@2212.74,1861 ; D1.1@2182.74,1860 2254,1860 v1@2621,2227
  Bottom Layer w20: K1.COIL1@285.58,980.85 396.85,980.85 475,1059 ; D9.2@331,866.74 374.51,823.23 C6.1@418.13,823.23 ; 776,1067 776,1395 810,1429 v1(810,1568) ; v1@1161,1945 1365,2149 v1(2073.47,2149) ; v1(2632,2226) 2633,2227 JP?.39@2798,2227 ; JP?.23@2798,627 2756,627 2418,965 1263,965 1179.15,1048.85 K2.COIL1@992.58,1048.85 982.43,1059 776,1059 ; 475,1059 483,1059 776,1059 ; 475,1059 776,1059
  Bottom Layer w80: K1.COIL1@285.58,980.85 331,935.43 D9.2@331,866.74 ; K2.COIL1@992.58,1048.85 1088,953.43 D14.2@1088,843
AGND: C4.2 C5.1 C7.1 C9.2 C10.2 C12.2 C29.1 C30.1 C43.1 C50.2 C51.2 C54.2 C55.2 C56.2 CF2.1 IC1.4 NT4.2 NTC1.1 R35.2 R42.2 U4.8 U5.1 U5.2 U8.2 | length 3344.1
  Top Layer w8: U5.2@929,1336.8 941.8,1336.8 ; v1(1456,1586) 1471,1586 1481.53,1575.47 U4.8@1481.53,1533.15
  Top Layer w20: C9.2@941.53,1396 C9.2@941.8,1396.27 ; v1(941.59,1449.06) C10.2@942.53,1450 942.53,1680.81 NTC1.1@963.2,1701.48 ; 941.8,1336.8 C9.2@941.8,1396.27 ; C10.2@942.53,1449.06 942.53,1397 C9.2@941.8,1396.27 ; C5.1@1611,1328 1620.53,1328 C5.1@1621,1328.47 ; C5.1@1621,1327.47 1639.23,1327.47 1639.7,1327 1676.53,1327 C30.1@1677,1327.47 ; C30.1@1677.5,1327.47 1678.03,1328 1732.53,1328 CF2.1@1733,1328.47 ; CF2.1@1734,1327.47 1735.54,1329.02 1827.46,1329.02 1827.46,1320.54 1841,1307 ; C29.1@1791,1542 C7.1@1791,1487 1791,1455 v1(1841,1405) 1841,1307 ; R35.2@1966,1258.53 1966,1302 ; 2192,1315 2192,1382.4 U8.2@2242,1382.4 ; C43.1@2240.47,984 2178.53,984 C12.2@2177.53,985 C4.2@2177.53,1040 2177.53,1211.53 ; NT4.2@2247.02,1315 2176,1315 ; R42.2@2337,1264.53 2321.47,1249 IC1.4@2259.22,1249 2215,1249 2177.53,1211.53 ; 1841,1307 1961,1307 1966,1302 ; 1966,1302 1966,1316 C50.2@2003,1353 C51.2@2058,1353 2058,1335 2078,1315 2176,1315 ; 2176,1315 2177.53,1313.47 2177.53,1211.53
  Bottom Layer w20: v1(941.59,1449.06) 1159.06,1449.06 1253,1543 1442.94,1543 1456,1543 ; C55.2@1437,1453.91 C56.2@1437,1505.53 ; C54.2@1442.23,1403 C55.2@1442.23,1449.06 ; C56.2@1442.94,1505.53 1442.94,1541.34 ; v1(1456,1586) 1456,1543 ; v1(1841,1405) 1841,1427 1824,1444 1760.77,1444 1631,1444 1532,1543 1456,1543
  other v1: 2013.53,999.53 1917.53,1001.53 1808.53,1010.53 2351.86,1018.53 1782.53,1054.53 1729.83,1079.85 1887.53,1088.53 2119.53,1088.53 1852.48,1106.29 2122.55,1135.55 1496.53,1141.53 1072.53,1149.53 1115.53,1151.53 1623.88,1153.03 2105.53,1172.53 1679.53,1173.53 1025.53,1192.53 1716.53,1206.53 2242.53,1241.53 2336.53,1264.06 1917.53,1264.53 2269.53,1266.53 2153.49,1270.01 2215.94,1282.39 2053.53,1296.53 1909.53,1302.53 1077.53,1312.53 1004.53,1314.53 1043.36,1326.33 1001.56,1362.43 1075.53,1361.53 1931.53,1362.53 941.33,1366.06 1039.53,1369.53 2191.53,1381.93 1911.56,1398.28 1822.53,1423.53 1793.02,1435.75 1962.53,1448.53 2101.53,1450.53 941.53,1502.53 1591.53,1517.53 939.53,1539.53 1632.53,1556.53 941.53,1605.53 941.53,1639.53
AVCC: C4.1 C9.1 C10.1 C12.1 C50.1 C51.1 C54.1 C55.1 C56.1 IC1.8 R4.1 U4.9 U5.3 U8.5 | length 2786.7
  Top Layer w8: C9.1@882.47,1396 903.41,1375.06 U5.3@903.41,1336.8 ; v1(1496,1465) 1501,1470 1501,1528.92 1498.99,1530.93 U4.9@1501.21,1533.15
  Top Layer w20: R4.1@881,1523.47 v1(881,1451) 881,1450.47 C10.1@882.47,1449 ; C9.1@882.47,1396 C10.1@882.47,1449 ; C10.1@883.47,1450 C10.1@882.47,1449 ; v1(2003,1412.06) C51.1@2058,1412.06 2084.94,1412.06 2143.18,1353.82 U8.5@2143.18,1345 ; IC1.8@2036.78,1099 2095.78,1040 C4.1@2115.54,1040 ; C12.1@2118.47,985 C4.1@2118.47,1037.15
  Bottom Layer w20: v1(881,1451) 919,1413 1263,1413 1318,1358 1491,1358 1501.28,1368.28 C54.1@1501.28,1403 1503,1403 C55.1@1503,1453.91 ; v1(1496,1465) C55.1@1505.04,1455.96 ; C55.1@1501.29,1453.91 1501.29,1418 1750,1418 1778,1390 1778,1124 1864.85,1037.15 v1@2112.85,1037.15 ; C55.1@1501.99,1464 C56.1@1501.99,1505.53 ; v1(2003,1412.06) 2003,1147 v1@2112.85,1037.15 ; v1(2115.54,1037.15) v1@2112.85,1037.15
Blue: *.2 BLUE.1 D15.1 K2.NO | length 1199.5
  Top Layer w80: K2.NO@1394.16,655.15 1394.16,611.84 1586.26,419.74 D15.1@2015,419.74 2231,419.74 ; BLUE.1@2226,541 2226,424.74 2231,419.74 ; *.2@2330.73,379.35 2290.34,419.74 2231,419.74
BT1: JP?.28 U4.46 | length 1959.7
  Top Layer w8: v1(1209,1624) 1216.1,1631.1 U4.46@1285.15,1631.1
  Bottom Layer w8: v1(1209,1624) 1282,1624 1390,1624 1427,1661 1631,1661 1662,1630 1708,1630 1811,1527 2417,1527 2648,1296 2648,1202 2723,1127 JP?.28@2798,1127
BT2: JP?.13 U4.45 | length 2036.4
  Top Layer w8: v1@1206,1657.91 1207.1,1656.81 1244.03,1656.81 1250.06,1650.79 U4.45@1285.15,1650.79
  Bottom Layer w8: v1(1206,1658) 1402,1658 1422,1678 1658,1678 1692,1644 1718,1644 1820,1542 2424,1542 2695,1271 2695,1227 2743,1179 2846,1179 JP?.13@2898,1127
BT3: JP?.29 U4.43 | length 1709.7
  Top Layer w8: U4.43@1285.15,1690.16 1335.84,1690.16 v1(1340,1686)
  Bottom Layer w8: v1(1340,1686) 1408.15,1686 1414.15,1692 1665,1692 1699,1658 1724,1658 1825,1557 2449,1557 2779,1227 JP?.29@2798,1227
BT4: JP?.12 U4.42 | length 1826
  Top Layer w8: U4.42@1285.15,1709.84 1359.16,1709.84 1366,1703 v1(1366,1709)
  Bottom Layer w8: v1(1366,1709) 1671,1709 1708,1672 1731,1672 1830,1573 2461,1573 2751,1283 2850,1283 2898,1235 JP?.12@2898,1227
BT5: JP?.30 U4.41 | length 1814.5
  Top Layer w8: v1(1221,1728) 1222.53,1729.53 U4.41@1285.15,1729.53
  Bottom Layer w8: v1(1221,1728) 1229,1736 1385,1736 1398,1723 1680,1723 1717,1686 1741,1686 1840,1587 2479,1587 2739,1327 JP?.30@2798,1327
buzzer: JP?.27 U4.3 | length 1850.4
  Top Layer w8: U4.3@1383.1,1533.15 1383.1,1576.1 1386.79,1579.79 1386.79,1581.41 1422,1616.63 1431.37,1626 1433,1626 1435,1628 1511,1628 1522,1617 v1(1522,1613)
  Bottom Layer w8: v1(1522,1613) 1524,1615 1625,1615 1678.09,1561.91 1706.09,1561.91 1790,1478 2388,1478 2508,1358 2508,1158 2639,1027 JP?.27@2798,1027
CLK: JP1.3 U4.37 | length 363.2
  Top Layer w8: JP1.3@1066,1609 1117,1609 1131,1623 1131,1728 1211.27,1808.27 U4.37@1285.15,1808.27
CS: JP?.34 U4.21 | length 1202.3
  Top Layer w8: U4.21@1618.85,1749.21 1691.21,1749.21 1708,1766 v1(1731,1766)
  Bottom Layer w8: v1(1731,1766) 1735,1762 1774,1762 2703,1762 2738,1727 JP?.34@2798,1727
current_sense: CF2.2 RF2.2 U4.12 | length 1145.6
  Top Layer w8: U4.12@1560.27,1533.15 1560.27,1501.73 1570,1492 1640.2,1492 1725.2,1407 1726,1407 1734,1399 1734,1380 v1(1732,1378)
  Top Layer w20: RF2.2@1065.53,1261 1071,1261 1071,1195 v1(1073,1193)
  Bottom Layer w8: v1(1073,1193) 1657,1193 1734,1270 1734,1376 v1(1732,1378)
DC: JP?.8 U4.18 | length 1347
  Top Layer w10: U4.18@1618.85,1690.16 1753.16,1690.16 1779,1716 1880.74,1716 1903,1738.26 v1(1903,1739)
  Bottom Layer w10: v1(1903,1739) 1904,1740 2686,1740 2748,1678 2847,1678 JP?.8@2898,1627
enc_a: JP?.10 U4.38 | length 1768.8
  Top Layer w8: U4.38@1285.15,1788.58 1345.58,1788.58 1349,1792 v1(1349,1794)
  Bottom Layer w8: v1(1349,1794) 1350.81,1792.19 1672.66,1792.19 1707,1757.85 1707,1757 1735,1729 1769,1729 1866,1632 2573,1632 2603,1602 2730,1475 2850,1475 JP?.10@2898,1427
enc_b: JP?.31 U4.39 | length 1787.1
  Top Layer w8: v1(1218.92,1768.23) 1219.15,1768 1222,1768 1222.9,1768.9 U4.39@1285.15,1768.9
  Bottom Layer w8: v1(1218.92,1768.23) 1675.77,1768.23 1730,1714 1763,1714 1859,1618 2537,1618 2728,1427 2738,1427 JP?.31@2798,1427
enc_c: JP?.11 U4.40 | length 1787.7
  Top Layer w8: U4.40@1285.15,1749.21 1463.79,1749.21 v1(1468,1745)
  Bottom Layer w8: v1(1468,1745) 1679,1745 1724,1700 1753,1700 1852,1601 2499,1601 2724,1376 2849,1376 JP?.11@2898,1327
GND: AMS1.1 BT1.2 C1.1 C8.1 C13.2 C14.2 C21.1 C44.2 C45.2 C46.2 C47.2 C48.2 C49.2 C52.2 C53.2 C65.2 C66.2 JP1.4 JP?.2 JP?.3 JP?.4 JP?.16 JP?.17 NT3.2 NT4.1 R22.2 R26.1 R28.1 R34.1 U1.3 U3.3 U4.23 U4.35 U4.47 XT1.G | length 8982.2
  Top Layer w8: C49.2@1221,1552.53 C49.2@1224,1555.53 ; C66.2@1498,1315.69 1509.22,1315.69 1520,1326.47
  Top Layer w11: C49.2@1224,1555.53 1224,1599 1236.42,1611.42 U4.47@1285.15,1611.42 1364.42,1611.42 ; XT1.G@1285.2,1402.31 1310,1427.11 1310,1557 1364.42,1611.42 ; v1(1291,1944.53) 1329.47,1944.53 1363.42,1910.58 U4.35@1363.42,1866.85 ; 1826.06,1819 1792.12,1819 1791.92,1818.8 1743.02,1818.8 1742.82,1819 1710,1819 1679.58,1788.58 U4.23@1618.85,1788.58 1577.58,1788.58 1487,1698 1451,1698 1364.42,1611.42
  Top Layer w20: C21.1@846.53,2100 846.53,2017.47 868,1996 U3.3@911,1996 923,1984 975.94,1984 R26.1@984,1992.06 992.06,1984 1063,1984 1280,2201 v1(1514,2201) ; JP1.4@1066,1509 1081,1509 1124.53,1552.53 C48.2@1167,1552.53 ; R22.2@1167,1608.94 C48.2@1167,1552.53 ; C49.2@1221,1552.53 C48.2@1167,1552.53 ; C65.2@1225.53,1381 1263.89,1381 XT1.G@1285.2,1402.31 ; v1(1439,1311) 1439,1311.5 XT1.G@1434.8,1315.69 1446.58,1327.47 C66.2@1498,1327.47 ; C13.2@1826.06,1832 1826.06,1819 1826.06,1765.94 R28.1@1827,1765 ; C13.2@1826.53,1832 1895,1832 1934,1793 1934,1558 1950.28,1541.72 ; BT1.2@1829,1163 1845,1179 v1(1845,1277) ; v1(1873,1340) 1873,1464.45 1950.28,1541.72 ; v1(2130,2194) 2132.53,2191.47 C1.1@2132.53,2149 2132.53,2059.47 2142,2050 U1.3@2195.13,2050 2274.53,2050 R34.1@2276,2048.53 ; NT4.1@2266.71,1315 2332,1315 2337,1320 C53.2@2337,1353 C52.2@2393,1353 2449,1353 2478,1382 ; v1(2634,2073) 2603,2042 2603,1644 2584.47,1625.47 C8.1@2507,1625.47 2507,1523 ; JP?.17@2898,727 2846,675 2566,675 2478,763 2478,1382 ; JP?.3@2898,2127 JP?.2@2898,2227 ; 1950.28,1541.72 1990.55,1501.45 AMS1.1@2306.17,1501.45 2442.18,1501.45 C46.2@2449,1508.27 2492.27,1508.27 2507,1523 ; 2478,1382 2507,1411 2507,1523
  Bottom Layer w20: JP1.4@1066,1509 1139,1509 1161,1531 1161,1781 1160,1782 1160,1875 1229.53,1944.53 v1(1291,1944.53) ; v1(1221,1381) 1291,1311 v1(1439,1311) ; v1(1514,2201) 2127,2201 2130,2198 v1(2130,2194) 2138,2202 2498,2202 v1@2628.53,2071.47 ; v1(1845,1277) 1845,1329 1856,1340 v1(1873,1340) ; v1@2634,2071.47 C44.2@2666,2071.47 C45.2@2720,2071.47 2725.02,2076.5 2882.41,2076.5 2888.7,2076.5 v1@2897.5,2076.5 ; JP?.17@2898,727 JP?.16@2898,827 ; JP?.4@2898,2027 2898,2058.41 2898,2067.7 v1@2898,2077 ; v1@2898,2075.99 v1@2897.5,2076.5 ; JP?.2@2898,2227 JP?.3@2898,2127 v1@2898,2077 ; v1@2897.5,2076.5 v1@2898,2077
  other v1: 2796.94,239.1 2837.53,303.53 2915.65,311.71 2761.96,360.57 2712.6,467.08 2557.53,516.53 2626.53,557.53 2707.53,565.53 2542.87,590.91 2630.33,622.95 2528.53,667.53 2616.48,678.37 2555.53,719.53 2958.53,731.53 2906.53,775.53 2958.53,841.53 2682.53,884.53 2644.19,941.61 2696.53,963.53 2609.07,972.13 2592.53,1004.53 2565.53,1033.53 2508.18,1935.03 2565.53,1942.53 2612.19,1964.51 2543.53,1966.53 2949.53,1997.53 2570.53,2011.53 2897.53,2071.53 2945.53,2092.45 2945.53,2187.53
Green: *.3 GREEN.1 R32.2 | length 1018.1
  Top Layer w20: v1(2391.02,584.11) 2391.02,612.07 2393,614.04 R32.2@2393,1090.47
  Bottom Layer w20: *.3@2261.54,266.15 2179,348.69 2179,492 2272,585 2390.13,585 v1(2391.02,584.11)
heater: R48.1
HS1: D2.1 Q1.1 R5.2 R43.1 | length 327.8
  Top Layer w20: Q1.1@2337,2320 2337,2241 2374,2204 R43.1@2406.47,2204 2406.47,2179.47 R5.2@2368.88,2141.88 2426.81,2141.88 D2.1@2446.85,2121.85
HS2: D5.1 Q2.1 R12.2 R44.2 | length 379.6
  Top Layer w20: Q2.1@346,2320 346,2238 382,2202 R44.2@424.47,2202 389.15,2166.68 D5.1@389.15,2100.85 412.31,2124 R12.2@468,2124
IO: JP1.2 U4.34 | length 459.8
  Top Layer w8: JP1.2@1066,1709 1087,1709 1225,1847 1244,1847 v1(1249,1852) ; U4.34@1383.1,1866.85 v1@1383.1,1922.9
  Bottom Layer w8: v1(1249,1852) 1303,1852 v1(1379,1928)
led: JP?.14 U4.2 | length 1961.1
  Top Layer w8: U4.2@1363.42,1533.15 1363.42,1583.42 1427,1647 1533,1647 v1(1542,1638)
  Bottom Layer w8: v1(1542,1638) 1623,1638 1685.09,1575.91 1717.09,1575.91 1799,1494 2403,1494 2538,1359 2538,1200 2663,1075 2850,1075 JP?.14@2898,1027
LS1: D3.1 Q3.1 R7.2 R58.1 | length 338.5
  Top Layer w20: D3.1@1660.15,2099.85 1688.19,2127.88 R7.2@1734.12,2127.88 1734.12,2196.65 R58.1@1741.47,2204 1691,2204 1673.33,2221.67 Q3.1@1673.33,2320
LS2: D6.1 Q4.1 R13.2 R59.1 | length 310.1
  Top Layer w20: Q4.1@962,2320 966,2316 966,2226 983,2209 R59.1@1030.21,2209 1030.21,2158.55 R13.2@1042.88,2145.88 ; R13.2@1055.88,2145.88 1110.85,2145.88 D6.1@1124.86,2131.86
MISO: JP?.9 U4.16 | length 1359.9
  Top Layer w10: U4.16@1618.85,1650.79 1619.64,1650 1862,1650 v1(1871,1659)
  Bottom Layer w10: v1(1871,1659) 1871,1664 1889,1682 2605,1682 2708,1579 2846,1579 JP?.9@2898,1527
MOSI: JP?.33 U4.17 | length 1228.2
  Top Layer w8: U4.17@1618.85,1670.47 1782.47,1670.47 1811,1699 1897,1699 v1(1906,1708)
  Bottom Layer w8: v1(1906,1708) 2663,1708 2744,1627 JP?.33@2798,1627
Net_2: ?.2 D14.1 K2.COIL2 Q12.3 | length 1236.8
  Bottom Layer w20: D14.1@1063.35,725.92 1576.92,725.92 1636.88,785.88 ; ?.2@1208.57,899.13 1276.71,831 1591.76,831 1636.88,785.88 ; v1(1692.13,785.88) 1636.88,785.88
  Bottom Layer w80: K2.COIL2@992.58,655.15 1057.63,655.15 D14.1@1088,685.52
NetC2_2: C2.2 C3.1 D1.2 U1.8 | length 272.7
  Top Layer w20: C2.2@1842,1968.47 C3.1@1913.13,1968.47 ; C3.1@1913.13,1960.77 1923.91,1950 U1.8@2010.87,1950 2026.26,1934.61 D1.2@2026.26,1857
NetC6_2: C6.2 D9.1 K1.COIL2 Q7.3 | length 1384.5
  Bottom Layer w20: D9.1@331,709.26 370.17,748.43 C6.2@418.13,748.43 435.71,766 1520,766 v1(1542,788)
  Bottom Layer w80: K1.COIL2@285.58,587.15 331,632.57 D9.1@331,709.26
NetC22_2: C22.2 C23.1 D4.2 U3.8 | length 287
  Top Layer w20: C22.2@559,1923.94 586.94,1896 U3.8@726.75,1896 745.26,1877.49 D4.2@745.26,1796
NetC43_2: C43.2 IC1.5 R10.1 | length 409.5
  Top Layer w20: C43.2@2299.53,984 2300.53,985 v1(2300.53,1040)
  Bottom Layer w20: v1(2034,1249) 2091.53,1249 v1(2300.53,1040)
NetC65_1: C65.1 U4.5 XT1.1 | length 371.5
  Top Layer w8: C65.1@1208,1329.94 C65.1@1221,1329.94 ; XT1.1@1285.2,1315.69 1311.69,1315.69 1382,1386 1382,1428 1422.47,1468.47 U4.5@1422.47,1533.15
  Top Layer w20: C65.1@1221,1326.47 1274.42,1326.47 XT1.1@1285.2,1315.69
NetC66_1: C66.1 U4.6 XT1.3 | length 219.9
  Top Layer w8: XT1.3@1434.8,1402.31 1442.16,1409.66 U4.6@1442.16,1533.15 ; C66.1@1508.5,1397.03 1520,1385.53
  Top Layer w20: XT1.3@1434.8,1402.31 1482.22,1402.31 C66.1@1498,1386.53
NetD2_2: D2.2 R5.1 U1.7 | length 434
  Top Layer w20: U1.7@2008.99,2000.17 2009.16,2000 U1.7@2010.87,2000 2011,2000 v1(2012,1999) ; R5.1@2324.85,2094 2324.85,2068.46 D2.2@2359.15,2034.15
  Bottom Layer w20: v1(2012,1999) 2120,1999 2220,2099 v1(2327,2099)
NetD3_2: D3.2 R7.1 U1.4 | length 547.5
  Top Layer w20: R7.1@1775.88,2086.12 1775.88,2038.88 v1(1752,2015) ; v1(1752,2015) 1749.15,2012.15 D3.2@1747.85,2012.15 1750.69,2015 v1(1752,2015)
  Bottom Layer w20: v1(1752,2015) 1841,2104 v1(2171,2104)
NetD5_2: D5.2 R12.1 U3.7 | length 359.1
  Top Layer w20: v1(478,2014) 509.76,2045.76 R12.1@509.76,2082.24 ; v1(722,1945) 725.75,1945 U3.7@726.75,1946
  Bottom Layer w20: v1(478,2014) 547,1945 v1(722,1945)
NetD6_2: D6.2 R13.1 U3.4 | length 202.8
  Top Layer w20: U3.4@911,2046 956,2046 1014.12,2104.12 1014.12,2075.19 1024.65,2064.65 D6.2@1047.15,2042.15
NetD10_1: D10.1 D13.1 Q9.1 R49.2 | length 321.2
  Top Layer w20: D10.1@1804,706 1830.35,679.65 Q9.1@1830.35,587.08 1864.55,587.08 R49.2@1917.47,640 1917.47,673.53 D13.1@1883,708
NetD13_2: D13.2 Q8.2 Q11.3 R49.1 | length 480.4
  Top Layer w20: Q11.3@1825.6,879.29 1828.58,876.31 1828.58,843.42 1848,824 1993,824 2001.2,832.2 ; R49.1@1976.53,640 2007.02,670.49 D13.2@2007.02,708 2001.2,713.81 2001.2,824 2001.2,832.2 ; Q8.2@2001.2,884.21 2001.2,832.2
NetIC1_1: IC1.1 R10.2 R31.2 | length 147.7
  Top Layer w20: R10.2@2241.47,1040 2241.47,1081.25 IC1.1@2259.22,1099 2328.47,1099 R31.2@2337,1090.47
NetIC1_2: IC1.2 R31.1 R32.1 | length 134
  Top Layer w20: IC1.2@2259.22,1149 2392.47,1149 R32.1@2393,1149.53
NetIC1_3: IC1.3 R40.1 R42.1 | length 136.5
  Top Layer w20: IC1.3@2259.22,1199 2386.53,1199 R40.1@2393,1205.47
NetIC1_6: IC1.6 R33.2 R35.1 | length 129.4
  Top Layer w20: R33.2@1908,1200.53 1909.06,1199.47 R35.1@1966,1199.47 2036.31,1199.47 IC1.6@2036.78,1199
NetIC1_7: IC1.7 R15.1 R33.1 | length 131.9
  Top Layer w20: R33.1@1908,1141.47 1966,1141.47 1973.53,1149 IC1.7@2036.78,1149
NetQ7_1: Q7.1 R9.1 | length 63
  Top Layer w20: R9.1@1579.53,946 1582,943.53 Q7.1@1582,884
NetQ8_1: Q8.1 Q11.1 R52.2 | length 267.9
  Top Layer w20: v1(2077,884) 2110.47,850.53 R52.2@2151,850.53
  Bottom Layer w20: v1(1899,879) 1904,884 v1(2077,884)
NetQ10_1: Q10.1 R48.2 | length 62.5
  Top Layer w20: R48.2@2294.53,828 2303,819.53 Q10.1@2303,769
NetQ10_3: Q10.3 R45.1 R52.1 | length 195.3
  Top Layer w20: R52.1@2151,791.47 2150,790.47 R45.1@2150,736.53 2178.47,736.53 2239.21,675.79 Q10.3@2264.8,675.79
NetQ12_1: Q12.1 R64.1 | length 62.9
  Top Layer w20: R64.1@1725.53,945 1725.53,888.47 Q12.1@1730,884
NetR22_1: R22.1 U4.44 | length 128.7
  Top Layer w8: R22.1@1167,1668 1181,1682 1223.81,1682 1235,1670.81 1249.83,1670.81 1250.17,1670.47 U4.44@1285.15,1670.47
NetR28_2: R28.2 U4.20 | length 163.8
  Top Layer w8: U4.20@1618.85,1729.53 1732.47,1729.53 R28.2@1767.94,1765
NetRF2_1: RF2.1 U5.6 | length 52
  Top Layer w8: U5.6@954.59,1261.2 1006.27,1261.2 RF2.1@1006.47,1261
PGND: C15.2 C16.2 C33.2 C34.2 C37.2 C38.2 C39.2 C40.2 C41.2 JP?.40 KF1.2 NT2.1 NT3.1 Q3.3 Q4.3 Q7.2 Q10.2 Q11.2 Q12.2 R6.1 R23.2 R24.2 R29.1 R58.2 R59.2 | length 11104.2
  Top Layer w8: NT2.1@582,1364 582,1414.98 v2@588,1420.98
  Top Layer w20: R24.2@654.94,1559 659,1554.94 R29.1@659,1420.98 ; R59.2@1089.26,2209 1114,2209 1162,2257 Q4.3@1162,2320 ; v1(1653,877) 1654.2,878.2 Q12.2@1654.2,884.21 ; R58.2@1800.53,2204 1859,2204 1873.33,2218.33 Q3.3@1873.33,2320 ; v1(2518.5,779.5) 2520,781 2520,1293.56 2543.5,1317.06 R23.2@2567,1317.06 ; 2783,2442 2798,2442
  Top Layer w40: R23.2@2567,1317.06 2567,1354 2699,1486 2699,2358 2783,2442
  Top Layer w80: C15.2@310,1250 365,1305 v2@365,1426 ; C34.2@365,1713 v2@365,1426 ; R29.1@659,1420.98 588,1420.98 R6.1@500,1420.98 494.98,1426 v2@365,1426 ; KF1.2@2189.66,3711.61 KF1.2@2221,3742.94 ; KF1.2@2206.98,3784.98 KF1.2@2209,3787 ; KF1.2@2212,3765 KF1.2@2214.5,3762.5 ; KF1.2@2222,3770 KF1.2@2222,3755 ; C16.2@2290.27,3496 2484,3496 2798,3182 C37.2@2798,2949.08 ; JP?.40@2798,2327 2798,2442 C37.2@2798,2949.08 ; C38.2@2798,3053.68 C37.2@2798,2949.08 ; KF1.2@2214.5,3762.5 2221,3769 KF1.2@2221,3756 ; KF1.2@2214.5,3762.5 KF1.2@2221,3756 ; KF1.2@2221,3742.94 KF1.2@2221,3756 ; KF1.2@2221,3742.94 2222,3743.94 KF1.2@2222,3755 ; KF1.2@2221,3756 KF1.2@2222,3755
  Bottom Layer w20: v1(1504,883) 1509,878 1735.77,878 1838.77,775 v2(1863,775) v1(2228,775) 2514,775 v1(2518.5,779.5)
  Bottom Layer w80: C15.2@310,1250 365,1305 C34.2@365,1713 733,1713 1209.67,2189.67 1209.67,2743 ; Q3.3@1873.33,2320 1873.33,2697.67 1838,2733 1219.67,2733 1209.67,2743 ; KF1.2@2212,3783.05 2212,3576 ; C16.2@2290.27,3496 2212,3574.27 2212,3576 ; C16.2@2292,3496 2212,3576 ; 1209.67,2743 1209.67,3210.67 1576,3577 C33.2@1819,3577 2211,3577 2212,3576
  other v1: 1600,3602 1621,3602 1642,3602 1663,3602 1684,3602 1705,3602 1726,3602 1747,3602 1768,3602 1789,3602 1810,3602 1831,3602 1852,3602 1852,3602 1873,3602 1873,3602 1894,3602 1915,3602 1936,3602 1957,3602 1978,3602 1999,3602 2020,3602 2041,3602 2062,3602 2083,3602 2104,3602 1600,3623 1621,3623 1642,3623 1663,3623 1684,3623 1705,3623 1726,3623 1747,3623 1768,3623 1789,3623 1810,3623 1831,3623 1852,3623 1852,3623 1873,3623 1873,3623 1894,3623 1915,3623 1936,3623 1957,3623 1978,3623 1999,3623 2020,3623 2041,3623 2062,3623 2083,3623 2104,3623 1600,3644 1621,3644 1642,3644 1663,3644 1684,3644 1705,3644 1726,3644 1747,3644 1768,3644 1789,3644 1810,3644 1831,3644 1852,3644 1852,3644 1873,3644 1873,3644 1894,3644 1915,3644 1936,3644 1957,3644 1978,3644 1999,3644 2020,3644 2041,3644 2062,3644 2083,3644 2104,3644 1600,3665 1621,3665 1642,3665 1663,3665 1684,3665 1705,3665 1726,3665 1747,3665 1768,3665 1789,3665 1810,3665 1831,3665 1852,3665 1852,3665 1873,3665 1873,3665 1894,3665 1915,3665 1936,3665 1957,3665 1978,3665 1999,3665 2020,3665 2041,3665 2062,3665 2083,3665 2104,3665 1600,3686 1621,3686 1642,3686 1663,3686 1684,3686 1705,3686 1726,3686 1747,3686 1768,3686 1789,3686 1810,3686 1831,3686 1852,3686 1852,3686 1873,3686 1873,3686 1894,3686 1915,3686 1936,3686 1957,3686 1978,3686 1999,3686 2020,3686 2041,3686 2062,3686 2083,3686 2104,3686 1600,3707 1621,3707 1642,3707 1663,3707 1684,3707 1705,3707 1726,3707 1747,3707 1768,3707 1789,3707 1810,3707 1831,3707 1852,3707 1852,3707 1873,3707 1873,3707 1894,3707 1915,3707 1936,3707 1957,3707 1978,3707 1999,3707 2020,3707 2041,3707 2062,3707 2083,3707 2104,3707 1600,3728 1621,3728 1642,3728 1663,3728 1684,3728 1705,3728 1726,3728 1747,3728 1768,3728 1789,3728 1810,3728 1831,3728 1852,3728 1852,3728 1873,3728 1873,3728 1894,3728 1915,3728 1936,3728 1957,3728 1978,3728 1999,3728 2020,3728 2041,3728 2062,3728 2083,3728 2104,3728 1600,3749 1621,3749 1642,3749 1663,3749 1684,3749 1705,3749 1726,3749 1747,3749 1768,3749 1789,3749 1810,3749 1831,3749 1852,3749 1852,3749 1873,3749 1873,3749 1894,3749 1915,3749 1936,3749 1957,3749 1978,3749 1999,3749 2020,3749 2041,3749 2062,3749 2083,3749 2104,3749 1600,3770 1621,3770 1642,3770 1663,3770 1684,3770 1705,3770 1726,3770 1747,3770 1768,3770 1789,3770 1810,3770 1831,3770 1852,3770 1852,3770 1873,3770 1873,3770 1894,3770 1915,3770 1936,3770 1957,3770 1978,3770 1999,3770 2020,3770 2041,3770 2062,3770 2083,3770 2104,3770 1600,3791 1621,3791 1642,3791 1663,3791 1684,3791 1705,3791 1726,3791 1747,3791 1768,3791 1789,3791 1810,3791 1831,3791 1852,3791 1852,3791 1873,3791 1873,3791 1894,3791 1915,3791 1936,3791 1957,3791 1978,3791 1999,3791 2020,3791 2041,3791 2062,3791 2083,3791 2104,3791 1600,3812 1621,3812 1642,3812 1663,3812 1684,3812 1705,3812 1726,3812 1747,3812 1768,3812 1789,3812 1810,3812 1831,3812 1852,3812 1852,3812 1873,3812 1873,3812 1894,3812 1915,3812 1936,3812 1957,3812 1978,3812 1999,3812 2020,3812 2041,3812 2062,3812 2083,3812 2104,3812 1600,3833 1621,3833 1642,3833 1663,3833 1684,3833 1705,3833 1726,3833 1747,3833 1768,3833 1789,3833 1810,3833 1831,3833 1852,3833 1852,3833 1873,3833 1873,3833 1894,3833 1915,3833 1936,3833 1957,3833 1978,3833 1999,3833 2020,3833 2041,3833 2062,3833 2083,3833 2104,3833 1600,3854 1621,3854 1642,3854 1663,3854 1684,3854 1705,3854 1726,3854 1747,3854 1768,3854 1789,3854 1810,3854 1831,3854 1852,3854 1852,3854 1873,3854 1873,3854 1894,3854 1915,3854 1936,3854 1957,3854 1978,3854 1999,3854 2020,3854 2041,3854 2062,3854 2083,3854 2104,3854 1600,3875 1621,3875 1642,3875 1663,3875 1684,3875 1705,3875 1726,3875 1747,3875 1768,3875 1789,3875 1810,3875 1831,3875 1852,3875 1852,3875 1873,3875 1873,3875 1894,3875 1915,3875 1936,3875 1957,3875 1978,3875 1999,3875 2020,3875 2041,3875 2062,3875 2083,3875 2104,3875
  other v2: 276,1315 297,1315 318,1315 339,1315 360,1315 381,1315 402,1315 423,1315 276,1336 297,1336 318,1336 339,1336 360,1336 381,1336 402,1336 423,1336 276,1357 297,1357 318,1357 339,1357 360,1357 381,1357 402,1357 423,1357 276,1378 297,1378 318,1378 318,1378 339,1378 339,1378 360,1378 360,1378 381,1378 402,1378 423,1378 276,1399 297,1399 297,1399 318,1399 318,1399 339,1399 339,1399 360,1399 381,1399 402,1399 423,1399 276,1420 297,1420 297,1420 318,1420 318,1420 339,1420 339,1420 360,1420 360,1420 381,1420 381,1420 402,1420 402,1420 402,1420 423,1420 444,1420 444,1420 465,1420 465,1420 486,1420 507,1420 507,1420 528,1420 549,1420 549,1420 570,1420 570,1420 591,1420 297,1441 318,1441 339,1441 339,1441 360,1441 360,1441 381,1441 402,1441 402,1441 423,1441 444,1441 444,1441 465,1441 465,1441 486,1441 507,1441 507,1441 528,1441 549,1441 549,1441 570,1441 570,1441 591,1441 297,1462 318,1462 339,1462 339,1462 360,1462 381,1462 402,1462 402,1462 423,1462 444,1462 444,1462 465,1462 465,1462 486,1462 507,1462 507,1462 528,1462 549,1462 549,1462 570,1462 570,1462 591,1462 297,1483 318,1483 339,1483 339,1483 360,1483 381,1483 402,1483 402,1483 423,1483 444,1483 444,1483 465,1483 465,1483 486,1483 507,1483 507,1483 528,1483 549,1483 549,1483 570,1483 570,1483 591,1483 339,1504 360,1504 381,1504 402,1504 402,1504 423,1504 444,1504 444,1504 465,1504 465,1504 486,1504 507,1504 507,1504 528,1504 549,1504 549,1504 570,1504 570,1504 591,1504 339,1525 360,1525 360,1525 381,1525 381,1525 402,1525 423,1525 423,1525 444,1525 444,1525 465,1525 486,1525 486,1525 507,1525 528,1525 549,1525 549,1525 549,1525 570,1525 570,1525 591,1525 339,1546 360,1546 381,1546 402,1546 402,1546 423,1546 444,1546 465,1546 465,1546 486,1546 507,1546 528,1546 528,1546 549,1546 570,1546 591,1546 339,1567 360,1567 381,1567 402,1567 402,1567 423,1567 444,1567 465,1567 465,1567 486,1567 507,1567 528,1567 528,1567 549,1567 570,1567 591,1567 339,1588 360,1588 381,1588 402,1588 423,1588 444,1588 465,1588 486,1588 507,1588 528,1588 549,1588 570,1588 591,1588 339,1609 360,1609 381,1609 402,1609 402,1609 423,1609 444,1609 465,1609 465,1609 486,1609 507,1609 528,1609 528,1609 549,1609 570,1609 591,1609 339,1630 360,1630 381,1630 402,1630 402,1630 423,1630 444,1630 465,1630 465,1630 465,1630 486,1630 486,1630 507,1630 528,1630 528,1630 549,1630 549,1630 570,1630 570,1630 591,1630 591,1630 444,1651 465,1651 486,1651 507,1651 528,1651 549,1651 570,1651 591,1651 444,1672 465,1672 486,1672 507,1672 528,1672 549,1672 570,1672 591,1672 444,1693 465,1693 486,1693 507,1693 528,1693 549,1693 570,1693 591,1693 444,1714 465,1714 486,1714 507,1714 528,1714 549,1714 570,1714 591,1714 444,1735 465,1735 486,1735 507,1735 528,1735 549,1735 570,1735 591,1735